# EAGLE board ece411-t17-thermal-hud (EAGLE 8.4.1)
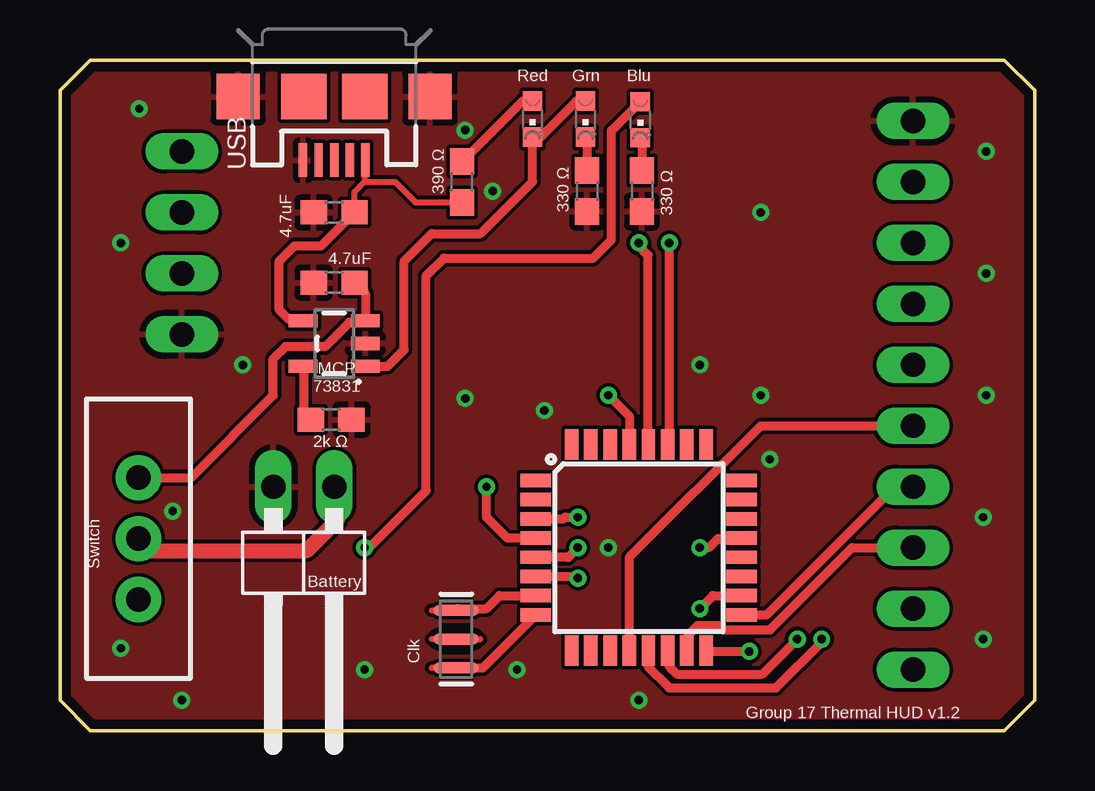
[diagram p0: board, top side]
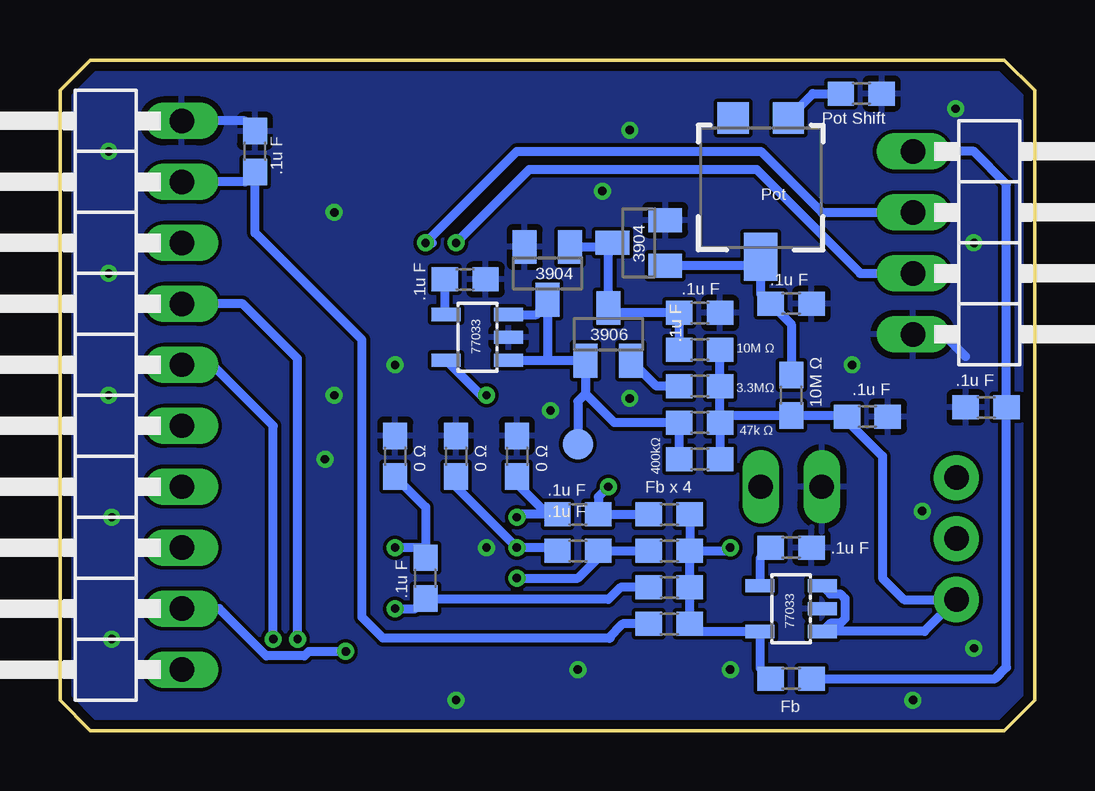
[diagram p1: board, bottom side, seen from below]

Size 40.64 x 27.94 mm. Coordinates in mm from the lower left corner, seen from the top.
Outline: 1.27,27.94 39.37,27.94 40.64,26.67 40.64,1.27 39.37,0 1.27,0 0,1.27 0,26.67 1.27,27.94
Copper layers (1*16): Top 0.0356mm / dielectric 1.5011mm / Bottom 0.0356mm
Design rules "oshpark-2layer": minimum track width 6mil, minimum drill 13mil, track to track 6mil, track to pad 6mil, pad to pad 6mil, via to via 6mil, smd to smd 6mil, copper to edge 15mil, drill to drill 6mil, minimum pad ring 7mil, minimum via ring 7mil, stop-mask expansion 2.5mil, vias tented up to drill 0mil, thermal gap 10mil

## Footprints (pad centres in the part's own frame; a part is rotated, then mirrored left to right if it is on the bottom)
0603 = smd 1.1 x 1: 1 -0.85,0; 2 0.85,0
SOT23-DBV = smd 0.55 x 1.2: 1 -0.95,-1.3; 2 0,-1.3; 3 0.95,-1.3; 4 0.95,1.3; 5 -0.95,1.3
USB-MICROB = smd 0.35 x 1.4: D+ 0,2.65; D- -0.65,2.65; GND 1.3,2.65; ID 0.65,2.65; VBUS -1.3,2.65 | smd 1.8 x 1.9: MT1 -4,0; MT2 4,0 | smd 1.9 x 1.9: P$1 -1.27,0; P$2 1.27,0
1X10/90 = drill 1.016 long: 1 -11.43,-3.81; 2 -8.89,-3.81; 3 -6.35,-3.81; 4 -3.81,-3.81; 5 -1.27,-3.81; 6 1.27,-3.81; 7 3.81,-3.81; 8 6.35,-3.81; 9 8.89,-3.81; 10 11.43,-3.81
1X04/90 = drill 1.016 long: 1 -3.81,-3.81; 2 -1.27,-3.81; 3 1.27,-3.81; 4 3.81,-3.81
1X02/90 = drill 1.016 long: 1 -1.27,-3.81; 2 1.27,-3.81
CHIPLED_0603 = smd 0.8 x 0.8: A 0,-0.75; C 0,0.75
SWITCH_SPDT_PTH_11.6X4.0MM = drill 1.016 pad 1.88: 1 0,2.54; 2 0,0; 3 0,-2.54
SOT23-BEC = smd 1 x 1.4: B -0.95,-1.1; C 0,1.1; E 0.95,-1.1
PAD.03X.05 = smd 1.27 x 1.27: P$1 0,0
TQFP32-08 = smd 1.27 x 0.559: 1 -4.293,2.8; 2 -4.293,2; 3 -4.293,1.2; 4 -4.293,0.4; 5 -4.293,-0.4; 6 -4.293,-1.2; 7 -4.293,-2; 8 -4.293,-2.8; 17 4.293,-2.8; 18 4.293,-2; 19 4.293,-1.2; 20 4.293,-0.4; 21 4.293,0.4; 22 4.293,1.2; 23 4.293,2; 24 4.293,2.8 | smd 0.559 x 1.27: 9 -2.8,-4.293; 10 -2,-4.293; 11 -1.2,-4.293; 12 -0.4,-4.293; 13 0.4,-4.293; 14 1.2,-4.293; 15 2,-4.293; 16 2.8,-4.293; 25 2.8,4.293; 26 2,4.293; 27 1.2,4.293; 28 0.4,4.293; 29 -0.4,4.293; 30 -1.2,4.293; 31 -2,4.293; 32 -2.8,4.293
SOT23-5 = smd 0.55 x 1.2: 1 -0.95,-1.3; 2 0,-1.3; 3 0.95,-1.3; 4 0.95,1.3; 5 -0.95,1.3
TRIMPOT-SMD-5MM = smd 1.3 x 1.3: A 1.15,-2.54; C -1.15,-2.54 | smd 1.402 x 2: B 0,3.239
RESONATOR-SMD-3.2X1.3 = smd 0.45 x 1.905: 1 -1.2,0; 2 0,0; 3 1.2,0

## Placement (x,y rotation side)
C1  0.1uF  [0603]  25.4,6.35 90 bottom
C2  0.1uF  [0603]  19.05,9.02 180 bottom
C3  0.1uF  [0603]  19.05,7.49 180 bottom
C4  0.1uF  [0603]  13.97,17.4 0 bottom
C5  0.1uF  [0603]  10.16,17.78 0 bottom
C6  0.1uF  [0603]  23.75,18.8 0 bottom
C7  0.1uF  [0603]  6.98,13.08 0 bottom
C8  0.1uF  [0603]  10.16,7.62 0 bottom
C9  4.7uF  [0603]  11.43,21.59 180 top
C10  4.7uF  [0603]  11.43,18.67 180 top
C11  0.1uF  [0603]  2.03,13.46 180 bottom
C12  0.1uF  [0603]  32.51,24.13 90 bottom
FB1  30Ω/1.8A  [0603]  15.24,5.97 180 bottom
FB2  30Ω/1.8A  [0603]  15.24,9.02 180 bottom
FB3  30Ω/1.8A  [0603]  15.24,7.49 180 bottom
FB4  30Ω/1.8A  [0603]  10.16,2.16 0 bottom
FB5  30Ω/1.8A  [0603]  15.24,4.45 180 bottom
IC1  TPS77033  [SOT23-DBV]  23.24,16.38 90 bottom
IC2  TPS77033  [SOT23-DBV]  10.16,5.08 90 bottom
J2  USB-MICROB  [USB-MICROB]  11.43,26.42 180 top
JP1  [1X10/90]  39.37,13.97 90 bottom
JP2  [1X04/90]  1.27,20.32 270 bottom
JP3  [1X02/90]  10.16,6.35 180 top
LED1  [CHIPLED_0603]  19.7,25.48 180 top
LED2  [CHIPLED_0603]  21.91,25.48 180 top
LED3  [CHIPLED_0603]  24.19,25.45 180 top
R1  10M  [0603]  13.97,15.88 0 bottom
R2  3.3M  [0603]  13.97,14.35 0 bottom
R3  47k  [0603]  13.97,12.83 0 bottom
R4  0  [0603]  24.13,11.43 270 bottom
R5  10M  [0603]  10.16,13.97 270 bottom
R6  400k  [0603]  13.97,11.3 0 bottom
R7  390  [0603]  16.76,22.86 90 top
R8  2k  [0603]  11.3,12.95 0 top
R9  330  [0603]  21.97,22.48 270 top
R10  330  [0603]  24.26,22.48 270 top
R12  0  [0603]  21.59,11.43 270 bottom
R13  0  [0603]  26.67,11.43 270 bottom
R14  0  [0603]  7.24,26.54 180 bottom
S2  [SWITCH_SPDT_PTH_11.6X4.0MM]  3.27,8 0 top
T1  [SOT23-BEC]  16.51,20.32 90 bottom
T2  [SOT23-BEC]  20.32,19.05 180 bottom
T3  MMBT3906LT1SMD  [SOT23-BEC]  17.78,16.51 0 bottom
TP1  TEST-POINT3X5  [PAD.03X.05]  19.05,11.94 0 bottom
U1  ATMEGA328P_TQFP  [TQFP32-08]  24.13,7.62 0 top
U2  MCP73831  [SOT23-5]  11.43,16.13 90 top
VR2  5k  [TRIMPOT-SMD-5MM]  11.43,22.99 180 bottom
Y1  16MHz  [RESONATOR-SMD-3.2X1.3]  16.51,3.81 270 top

## Library data of the parts
C1-C12 = SparkFun-Capacitors; PROD_ID: CAP-08604
FB1-FB5 = SparkFun-Coils; PROD_ID: NDUC-07859
IC1 IC2 = texas; MF: TEXAS INSTRUMENTS; MPN: TPS77033DBVT; OC_FARNELL: 8461570; OC_NEWARK: 77C1187
J2 = SparkFun-Retired; PROD_ID: CONN-09505
JP1-JP3 = pinhead
LED1-LED3 = led
R1-R3 R5-R10 = SparkFun-Resistors; PROD_ID: RES-08283
R4 R12-R14 = SparkFun-Resistors; PROD_ID: RES-08609
S2 = SparkFun-Switches; PROD_ID: SWCH-08261; SF_SKU: COM-00102
T1 T2 = transistor-neu-to92
T3 = transistor-pnp
TP1 = SparkFun-Connectors
U1 = SparkFun-IC-Microcontroller; PROD_ID: IC-09069
U2 = SparkFun-IC-Power; PROD_ID: IC-09995
VR2 = SparkFun-Resistors; PROD_ID: RES-11156
Y1 = SparkFun-Clocks; PROD_ID: XTAL-08900

## Nets
AGND: C1.2 R13.2 U1.21
AVCC: C1.1 FB1.2 U1.18
CAM_SCL: JP2.3 U1.28
CAM_SDA: JP2.2 U1.27
CAM_VCC: C11.1 FB4.2 JP2.1
GND: C4.2 C5.2 C6.2 C7.2 C8.2 C9.2 C10.2 C11.2 C12.2 IC1.2 IC2.2 J2.GND J2.MT1 J2.MT2 JP1.10 JP2.4 JP3.2 R4.1 R8.2 R9.2 R10.2 R12.1 R13.1 R14.1 T1.E T2.E U2.2 Y1.2
GND1: C2.2 R12.2 U1.3
GND2: C3.2 R4.2 U1.5
LIPO_POS: JP3.1 S2.2
MISO: JP1.2 U1.16
N$1: IC1.1 IC1.3 R3.1 R6.1 T2.C T3.B TP1.P$1
N$2: C5.1 R5.1 T1.B VR2.B
N$3: IC1.5 U1.29
N$4: C4.1 R1.1 T1.C T2.B T3.C
N$5: R2.1 T3.E
N$6: LED1.C LED2.A U2.1
N$7: C6.1 IC1.4
N$8: FB1.1 FB2.1 FB3.1 FB4.1 FB5.1 IC2.5 LED3.A
N$9: C8.1 IC2.4
N$10: LED1.A R7.2
N$11: C9.1 J2.VBUS R7.1 U2.4
N$12: R8.1 U2.5
N$13: C10.1 S2.1 U2.3
N$14: R14.2 VR2.C
N$15: U1.7 Y1.1
N$16: U1.8 Y1.3
N$17: LED2.C R9.1
N$18: LED3.C R10.1
OLED_DC: JP1.5 U1.12
OLED_MOSI: JP1.3 U1.15
OLED_OC: JP1.7 U1.14
OLED_RESET: JP1.6 U1.13
OLED_SCK: JP1.4 U1.17
OLED_VCC: C12.1 FB5.2 JP1.9
VBAT: C7.1 IC2.1 IC2.3 R1.2 R2.2 R3.2 R5.2 R6.2 S2.3
VCC1: C2.1 FB2.2 U1.4
VCC2: C3.1 FB3.2 U1.6

## Tracks (layer width: path | path; a pad name or v marks a point on that pad's centre or on a via)
AGND  (via drill 0.35)
  Top 0.381: v26.67,7.62 27.05,7.62 27.43,8 28.4,8 U1.21
  Bottom 0.381: 25.4,7.62 25.4,9.31 R13.2 | 25.4,7.62 C1.2 | 25.4,7.62 v26.67,7.62
AVCC  (via drill 0.35 pad 0.55)
  Top 0.381: U1.18 27.21,5.62 v26.67,5.08
  Bottom 0.381: v26.67,5.08 25.82,5.08 C1.1 25.36,5.46 17.78,5.46 17.27,5.97 FB1.2
CAM_SCL  (via drill 0.35)
  Top 0.381: U1.28 24.51,11.93 24.51,19.81 24.13,20.19 v24.13,20.32
  Bottom 0.381: JP2.3 7.28,19.05 11.61,23.38 21.07,23.38 v24.13,20.32
CAM_SDA  (via drill 0.35)
  Top 0.381: U1.27 25.4,11.98 v25.4,20.32
  Bottom 0.381: 25.11,20.32 v25.4,20.32 21.59,24.13 11.43,24.13 8.89,21.59 JP2.2
CAM_VCC
  Bottom 0.381: FB4.2 1.65,2.16 1.18,2.63 C11.1 1.18,22.77 2.54,24.13 JP2.1
GND  (via drill 0.35)
  Bottom 0.381: 2.88,15.58 3.81,16.51 JP2.4 | 32.93,25.4 JP1.10
  other vias: 38.61,24.13 38.61,19.05 38.48,8.89 38.48,3.81 38.61,13.97 16.89,25.02 20.19,13.34 26.67,15.24 29.21,21.59 18.03,22.48 29.21,13.97 29.59,11.3 22.86,7.62 19.05,2.54 24.13,1.27 12.7,2.54 5.08,1.27 2.54,3.43 4.7,9.14 7.62,15.24 2.54,20.32 3.3,25.91 16.89,13.84
  pour Bottom: 0,26.67 0,1.27 1.27,0 39.37,0 40.64,1.27 40.64,26.67 39.37,27.94 1.27,27.94
  pour Top: 1.27,0 39.37,0 40.64,1.27 40.64,26.67 39.37,27.94 1.27,27.94 0,26.67 0,1.27
GND1  (via drill 0.35)
  Top 0.152: 20.98,8.82 21.05,8.89
  Top 0.381: U1.3 20.98,8.82 | 21.05,8.89 v21.59,8.89
  Bottom 0.381: 20.32,9.02 C2.2 | 20.32,9.02 21.46,9.02 v21.59,8.89 | R12.2 21.59,10.29 20.32,9.02
GND2  (via drill 0.35 pad 0.55)
  Top 0.381: v21.59,7.62 21.19,7.22 U1.5
  Bottom 0.381: v21.59,7.62 21.46,7.49 | C3.2 20.03,7.62 v21.59,7.62 | R4.2 24.13,10.16 v21.59,7.62
LIPO_POS
  Top 0.635: S2.2 3.78,7.49 10.29,7.49 11.56,8.76 11.56,10.03 JP3.1
MISO  (via drill 0.35)
  Top 0.381: U1.16 26.95,3.3 27.94,3.3 v28.73,3.3
  Bottom 0.381: JP1.2 34,5.08 32.04,3.11 30.45,3.11 30.26,3.3 v28.73,3.3
N$1
  Bottom 0.381: 20.32,15.41 T3.B 18.73,14.03 | 20.32,17.78 20.32,15.41 | 20.32,17.78 T2.C | 18.73,14.03 17.53,12.83 R3.1 R6.1 | 18.73,14.03 19.05,13.71 TP1.P$1 | 20.32,15.41 21.92,15.41 IC1.1 | IC1.3 20.77,17.33 20.32,17.78
N$2
  Bottom 0.381: R5.1 10.16,16.93 C5.1 11.43,18.2 VR2.B 11.81,19.37 T1.B
N$3  (via drill 0.35)
  Top 0.381: v22.86,13.97 23.73,13.1 U1.29
  Bottom 0.381: IC1.5 23.08,13.97 v22.86,13.97
N$4
  Bottom 0.381: R1.1 C4.1 17.57,17.4 T3.C 17.78,20.15 | T2.B 17.78,20.15 | T1.C 17.78,20.15
N$5
  Bottom 0.381: R2.1 15.77,14.35 T3.E
N$6
  Top 0.381: 12.79,15.24 U2.1 13.65,15.18 14.35,15.88 14.35,19.56 15.49,20.7 17.53,20.7 19.7,22.87 LED1.C 20.03,24.73 21.53,26.23 LED2.A
N$7
  Bottom 0.381: C6.1 24.6,17.39 IC1.4
N$8  (via drill 0.35)
  Top 0.381: v12.7,7.62 12.89,7.62 15.27,10 15.27,18.95 16,19.68 22.22,19.68 22.99,20.45 22.99,25 LED3.A
  Bottom 0.381: FB2.1 FB3.1 | FB3.1 FB1.1 FB5.1 14.07,4.13 IC2.5 11.46,2.61 FB4.1 | FB3.1 12.83,7.49 v12.7,7.62
N$9
  Bottom 0.381: C8.1 11.46,7.17 IC2.4
N$10
  Top 0.381: R7.2 19.28,26.23 LED1.A
N$11
  Top 0.254: J2.VBUS 12.7,23.74 12.7,22.86 | 12.7,22.86 12.28,22.44 C9.1 | 12.7,22.86 13.97,22.86 14.82,22.01 R7.1
  Top 0.381: U2.4 10.06,17.14 9.53,17.14 9.14,17.53 9.14,19.56 9.78,20.19 10.88,20.19 C9.1
N$12
  Top 0.381: U2.5 10.16,15.15 10.16,12.7 10.41,12.95 R8.1
N$13
  Top 0.381: C10.1 12.73,18.22 U2.3 12.67,17.02 12.06,17.02 11.05,16 9.4,16 8.89,15.49 8.89,13.97 5.46,10.54 S2.1
N$14
  Bottom 0.381: VR2.C 9.26,26.54 R14.2
N$15
  Top 0.381: Y1.1 16.58,5.08 17.78,5.08 18.32,5.62 U1.7
N$16
  Top 0.381: Y1.3 17.63,2.61 U1.8
N$17
  Top 0.381: LED2.C 21.97,24.66 R9.1
N$18
  Top 0.381: LED3.C 24.26,24.63 R10.1
OLED_DC
  Top 0.381: U1.12 23.75,3.35 23.75,7.24 29.21,12.7 JP1.5
OLED_MOSI
  Top 0.381: U1.15 26.16,3.36 26.16,3.94 26.31,4.08 26.31,4.1 26.59,4.38 27.46,4.38 27.65,4.2 29.6,4.2 33.02,7.62 JP1.3
OLED_OC  (via drill 0.35)
  Top 0.381: U1.14 25.4,3.26 25.4,2.67 25.51,2.56 25.51,2.55 25.71,2.35 29.27,2.35 v30.73,3.81
  Bottom 0.381: v30.73,3.81 30.73,15.49 33.02,17.78 JP1.7
OLED_RESET  (via drill 0.35)
  Top 0.381: U1.13 24.53,2.69 24.51,2.67 25.4,1.78 29.84,1.78 31.75,3.68 v31.75,3.81
  Bottom 0.381: v31.75,3.81 31.75,12.7 34.29,15.24 JP1.6
OLED_SCK
  Top 0.381: U1.17 29.46,4.83 34.8,10.16 JP1.4
OLED_VCC
  Bottom 0.381: 17.78,3.85 27.18,3.85 28.05,4.72 28.05,16.28 32.51,20.74 C12.1 32.93,22.86 JP1.9 | 17.78,3.85 17.7,3.85 | 17.78,3.85 17.19,4.45 FB5.2
VBAT
  Bottom 0.381: R1.2 R2.2 R3.2 | IC2.3 8.53,5.7 8.12,5.7 7.92,5.5 7.92,4.66 8.12,4.46 8.53,4.46 IC2.1 4.6,4.13 S2.3 5.46,5.46 6.35,6.35 6.35,11.43 7.84,12.91 C7.1 7.87,13.12 R5.2 12.83,13.12 R3.2 | R3.2 R6.2
VCC1  (via drill 0.35 pad 0.55)
  Top 0.381: U1.4 18.65,8.02 17.78,8.89 v17.78,10.16
  Bottom 0.381: FB2.2 C2.1 18.2,9.74 v17.78,10.16
VCC2  (via drill 0.35 pad 0.55)
  Top 0.381: U1.6 21.52,6.42 v21.59,6.35
  Bottom 0.381: v21.59,6.35 19.05,6.35 18.2,7.2 C3.1 FB3.2

## Text on the board
tPlace: Red | Grn | Blu | USB | 4.7uF | 390 Ω | 330 Ω | 330 Ω | 4.7uF | MCP / 73831 | 2k Ω | Switch | Battery | Clk | Group 17 Thermal HUD v1.2
bPlace: Pot Shift | .1u F | Pot | 3904 | .1u F | 3904 | .1u F | .1u F | .1u F | .1u F | 77033 | 10M Ω | 3906 | .1u F | .1u F | 3.3MΩ | 10M Ω | 47k Ω | 400kΩ | 0 Ω | 0 Ω | 0 Ω | Fb x 4 | .1u F | .1u F | .1u F | .1u F | 77033 | Fb